# Altium PCB HACK_IO-C.PcbDoc
Units mm, origin at the board's own origin, x right, y up, seen from the top; angles counter-clockwise.
Board outline 41 x 13 mm, 6 copper layers (Top Layer, Mid-Layer 1, Mid-Layer 2, Mid-Layer 3, Mid-Layer 4, Bottom Layer); 21 components, 44 nets, 150 pads, 76 vias.
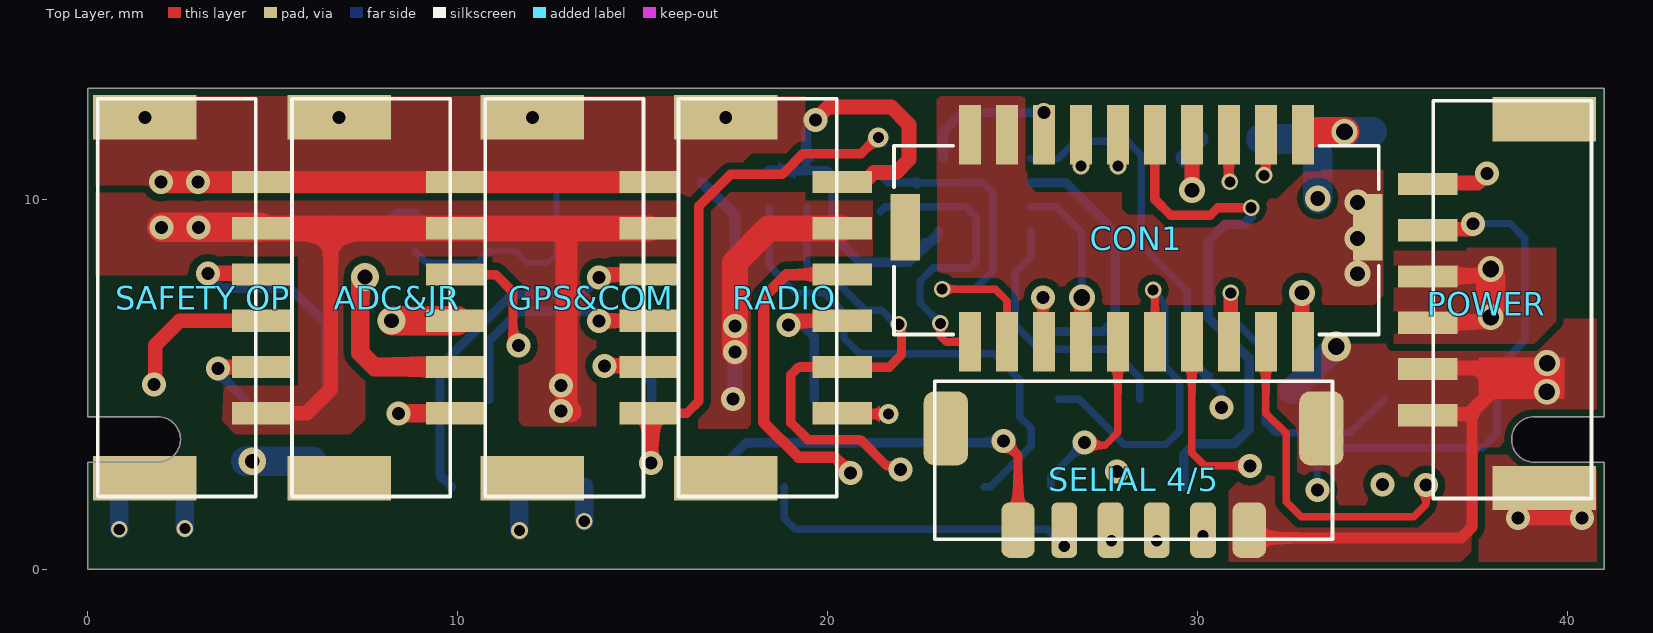
[diagram p0: Top Layer view]
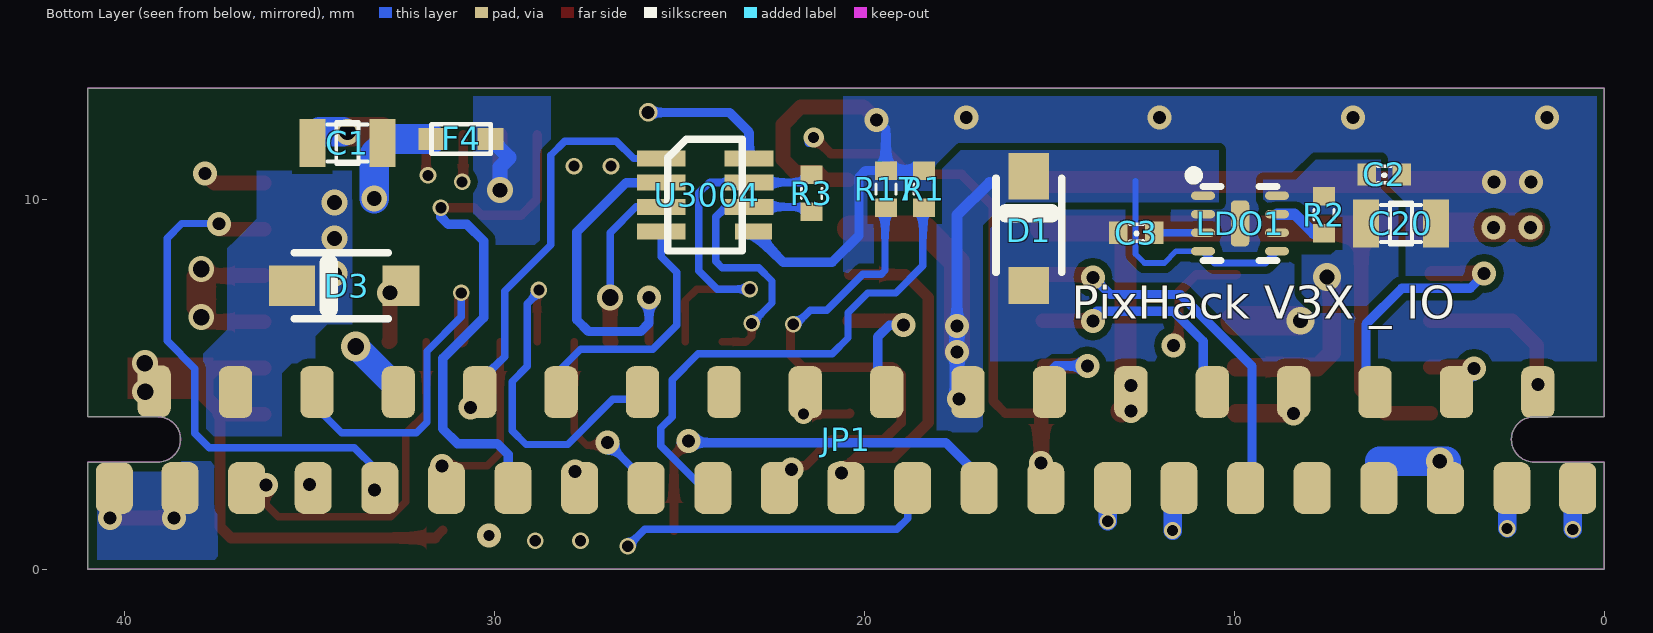
[diagram p1: Bottom Layer view, seen from below]
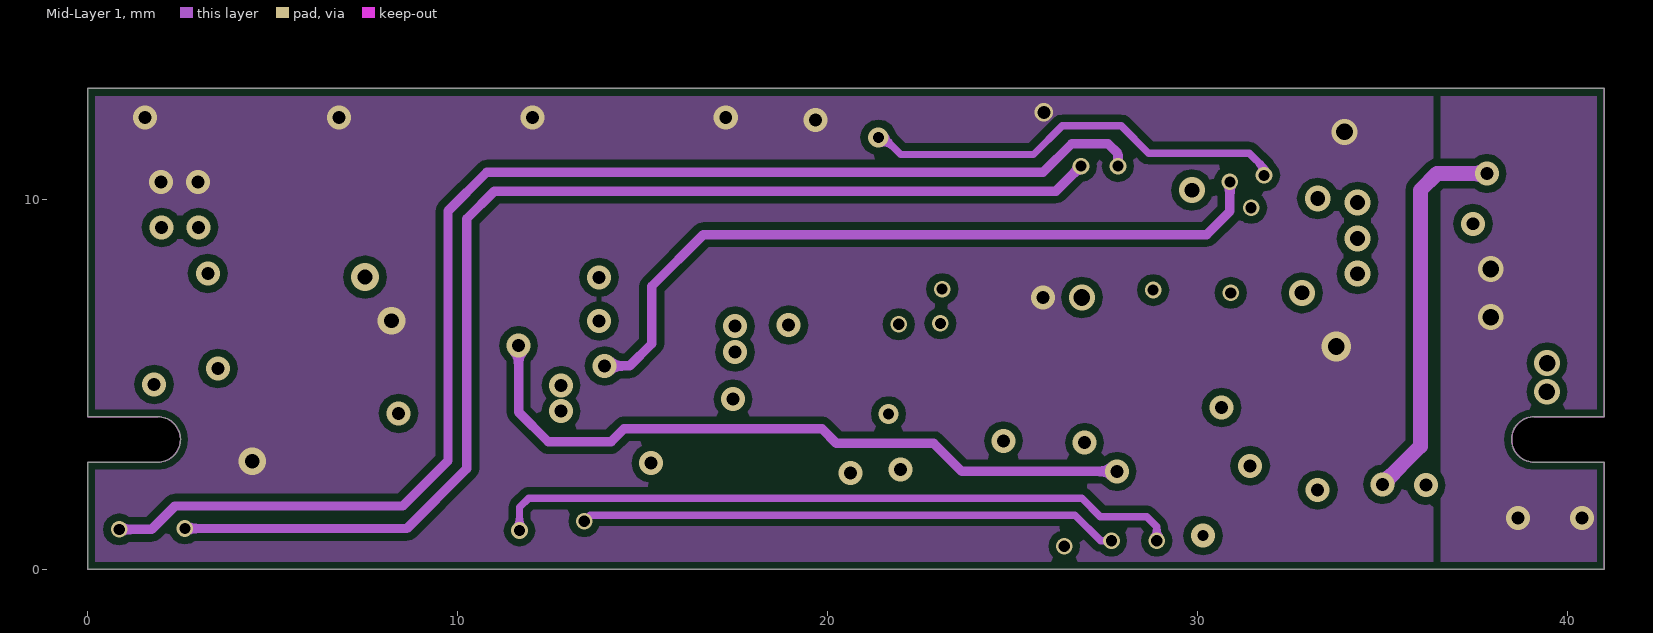
[diagram p2: Mid-Layer 1]
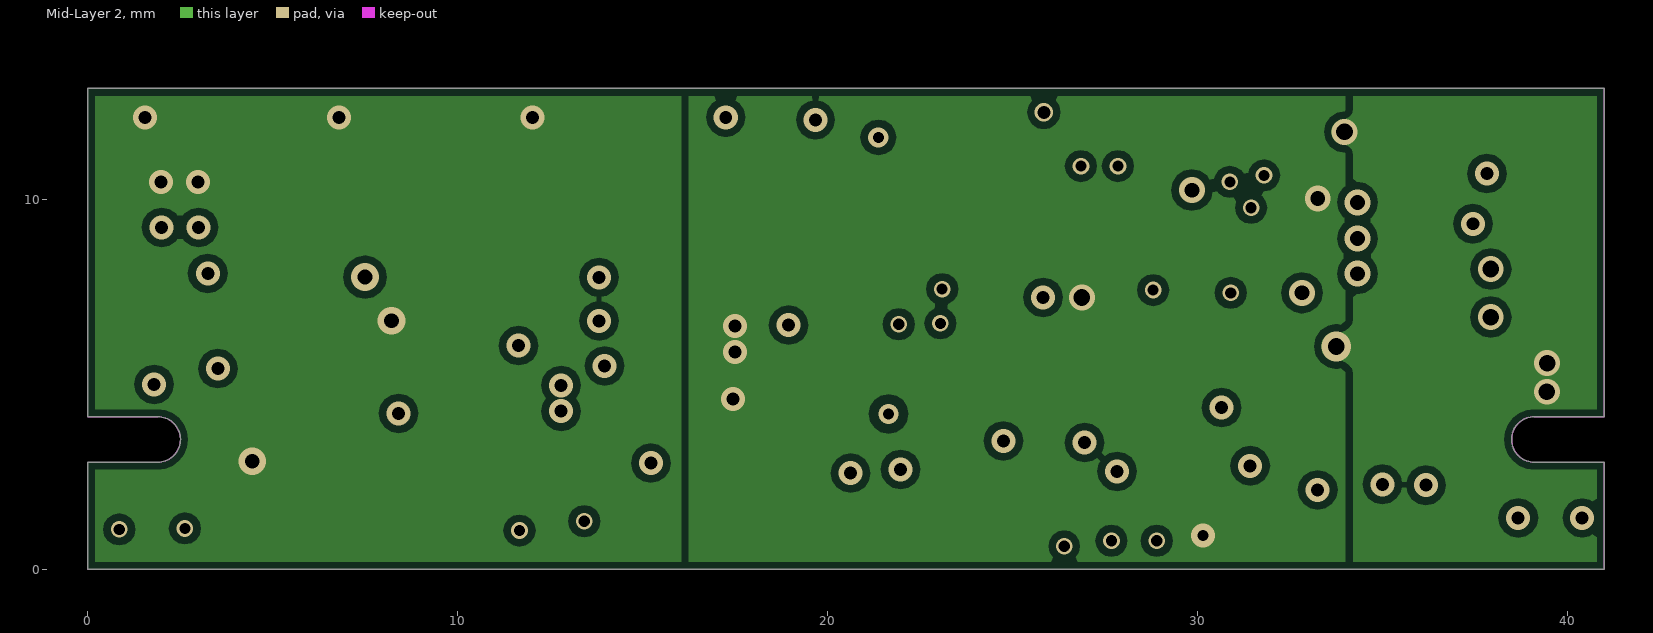
[diagram p3: Mid-Layer 2]
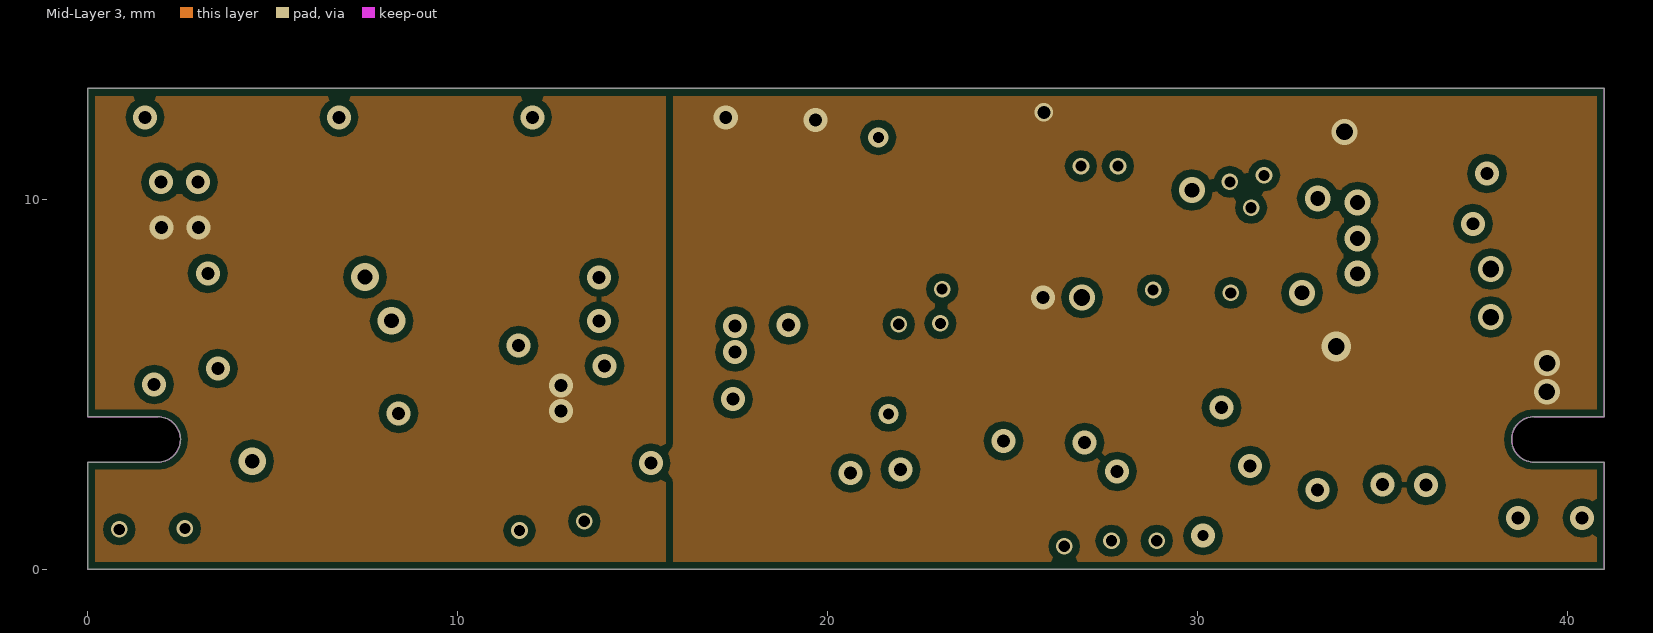
[diagram p4: Mid-Layer 3]
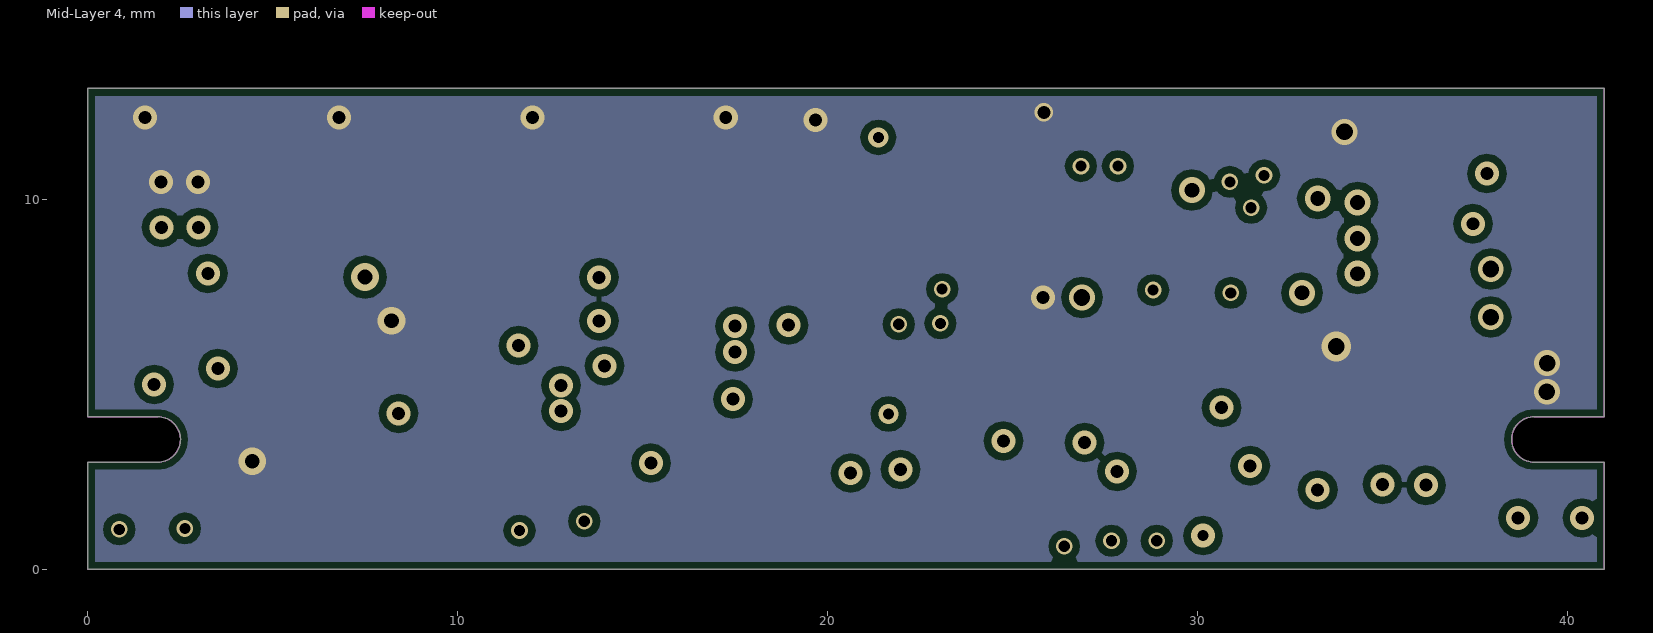
[diagram p5: Mid-Layer 4]
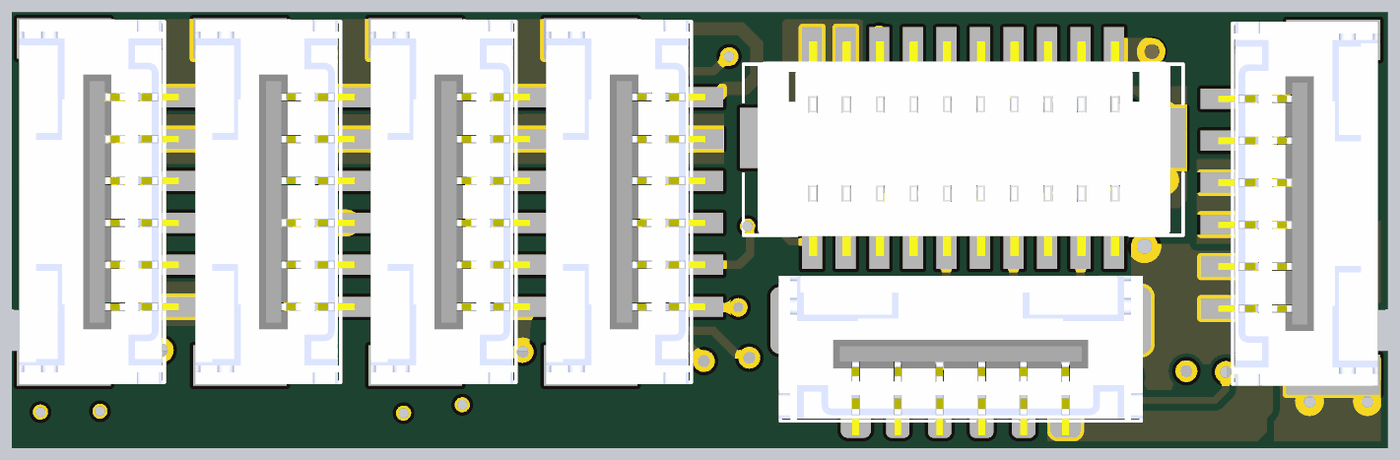
[diagram p6: 3D render of the assembled board from above, using the file's embedded part models]
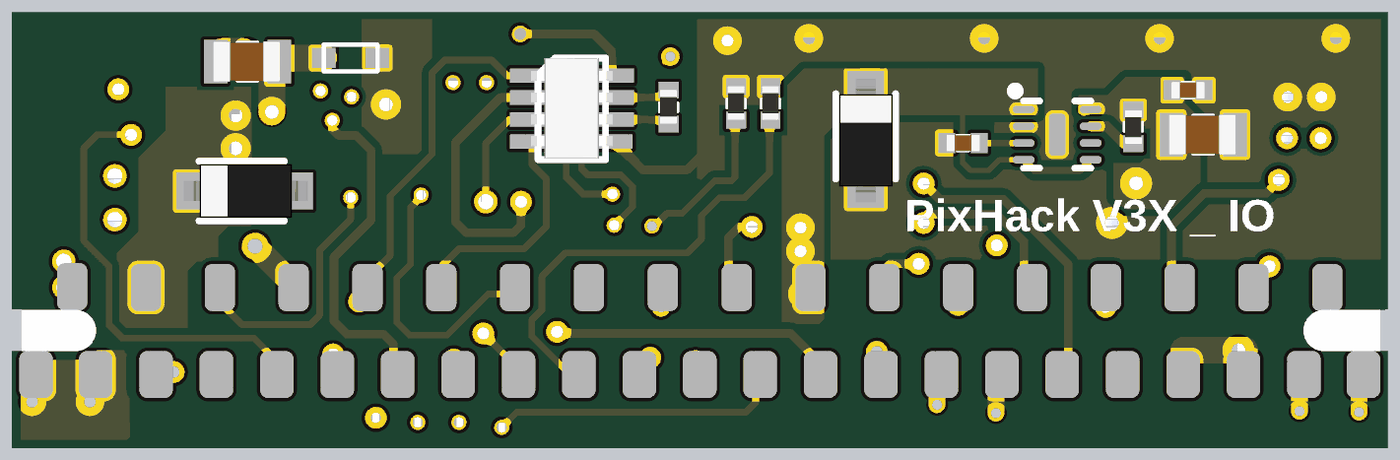
[diagram p7: 3D render of the assembled board from below, using the file's embedded part models]

## Layer stack, top to bottom
Top Solder: solder mask 0.0102, Solder Resist, Dk 3.5
Top Layer: signal copper 0.0356
Dielectric1: core 0.32, FR-4, Dk 4.8
Mid-Layer 1: signal copper 0.0356
Dielectric2: prepreg 0.32, FR-4, Dk 4.8
Mid-Layer 2: signal copper 0.0356
Dielectric3: core 0.32, FR-4, Dk 4.8
Mid-Layer 3: signal copper 0.0356
Dielectric5: dielectric 0.32, FR-4, Dk 4.8
Mid-Layer 4: signal copper 0.0356
Dielectric4: dielectric 0.32, FR-4, Dk 4.8
Bottom Layer: signal copper 0.0356
Bottom Solder: solder mask 0.0102, Solder Resist, Dk 3.5

## Board outline
0,0 0,2.9 1.9,2.9 ccw(c1.9,3.513) 1.9,4.125 0,4.125 0,13 41,13 41,4.125 39.1,4.125 ccw(c39.1,3.513) 39.1,2.9 41,2.9 41,0

## Design rules (kind name [scope] priority, off if disabled: settings)
Clearance [All] p1: gap=0.2
PlaneConnect [All] p1: planeconnectstyle=Direct reliefexpansion=0.508 reliefentries=4 reliefconductorwidth=0.254 reliefairgap=0.254
PolygonConnect [All] p1: connectstyle=Direct reliefconductorwidth=0.254 reliefentries=4 polygonreliefangle="90 Angle" airgapwidth=0.254
RoomDefinition HACK_IO-C [InComponentClass('HACK_IO-C')] p1: confinementstyle=ConfineIn formatcopy=TRUE lockcomponents=FALSE outline 42.135,1.422 60.961,1.422 60.961,7.548 42.135,7.548
RoutingVias [All] p1: holewidth=0.35 width=0.6 viastyle="Through Hole" minholewidth=0.3 minwidth=0.55 maxholewidth=0.7 maxwidth=1.27
SilkToSolderMaskClearance SilkscreenOverComponentPads [IsPad] p1: minsilkscreentomaskgap=0.254 clearancetoexposedcopper=TRUE
SolderMaskExpansion [All] p1: expansion=0.102
Width [All] p1: maxlimit=1 minlimit=0.15 preferedwidth=0.254 midlayer1_minwidth=0.2 midlayer2_minwidth=0.2 midlayer3_minwidth=0.254 midlayer3_maxwidth=0.254 midlayer4_minwidth=0.254 midlayer4_maxwidth=0.254 minimp=50.000000 maximp=50.000000 favimp=50.000000
28 further rules are at their usual default settings.

## Components (designator, comment, footprint, x,y, rotation, side; value= is the part's Value field where it differs from the comment)
ADC&JR "BM06B-GHS-TBT" GH1.25-6#1 9.85,7.318 r270 top
C1 "22UF" 0805CAP 33.975,11.55 r180 bottom
C2 "100NF" 0402CAP#1 5.95,10.65 r0 bottom
C3 "100NF" 0402CAP#2 12.65,9.075 r0 bottom
C20 "22UF" 0805CAP 5.5,9.375 r180 bottom
CON1 "501190-2027" SHD1X20 28.125,8.85 r0 top locked
D1 "D240L" SOD-123 15.45,9.1 r90 bottom
D3 "D240L" SOD-123 33.95,7.775 r0 bottom
F4 "0R" KYOCERA-KNH16-DA 30.925,11.75 r180 bottom
GPS&COM "BM06B-GHS-TBT" GH1.25-6#1 15.075,7.318 r270 top
JP1 "hack_op2" hack_op2 20.869,3.066 r0 top
LDO1 "MIC5330-SSYML" MIC5530 9.85,9.35 r180 bottom
POWER "BM06B-GHS-TBT" GH1.25-6#2 36.325,7.318 r90 top
R1 "100K" R0402 18.373,10.287 r270 bottom
R2 "0R" R0402 7.6,9.575 r90 bottom
R3 "100K" R0402 21.41,10.175 r270 bottom
R17 "100K" R0402 19.398,10.287 r270 bottom
RADIO "BM06B-GHS-TBT" GH1.25-6#1 20.3,7.318 r270 top
"SAFETY OP" "BM06B-GHS-TBT" GH1.25-6#1 4.6,7.318 r270 top
"SELIAL 4/5" "BM06B-GHS-TBT" GH1.25-6#3 28.25,0.762 r180 top
U3004 "MAX3051EKA+T" SOT23-8 24.195,10.128 r270 bottom

## Footprints (in the part's own frame and the unit in brackets; to place one, negate y for a bottom-side part, rotate by r counter-clockwise, add the part's x,y. Pads: shape width x height; smd on the part's side, far side on the other; paste and mask are expansions set on the pad)
0402CAP#1 [mm]
  rect 0.5x0.6 smd: 1(-0.475,-0.025) 2(0.475,-0.025)
  silkscreen extent -0.18,-0.25 0.18,0.2, body extent -0.5,-0.28 0.5,0.22, height 0.5
0402CAP#2 [mm]
  rect 0.5x0.6 smd: 1(-0.475,-0.025) 2(0.49,-0.025)
  silkscreen extent -0.18,-0.25 0.18,0.2, body extent -0.5,-0.28 0.5,0.22, height 0.5
0805CAP [mm]
  rect 0.7x1.3 smd: 1(-0.95,-0.025) 2(0.95,-0.025)
  silkscreen extent -0.55,-0.6 0.55,0.55, body extent -1.02,-0.62 0.98,0.58, height 1.2
GH1.25-6#1 [mm]
  rect 1.2x2.8 smd: 0(4.85,-3.05) 1(-4.9,-3.05)
  rect 0.6x1.6 smd: 1(-3.15,0.1) 2(-1.9,0.1) 3(-0.65,0.1) 4(0.6,0.1) 5(1.85,0.1) 6(3.1,0.1)
  silkscreen extent -5.4,-4.32 5.35,-0.05, body extent -5.45,-4.38 5.4,0.37, height 4.5
GH1.25-6#2 [mm]
  rect 1.2x2.8 smd: 0(4.85,-3.05) 3(-5.118,-3.05)
  rect 0.6x1.6 smd: 1(-3.15,0.1) 2(-1.9,0.1) 3(-0.65,0.1) 4(0.6,0.1) 5(1.85,0.1) 6(3.1,0.1)
  silkscreen extent -5.4,-4.32 5.35,-0.05, body extent -5.45,-4.38 5.4,0.37, height 4.5
GH1.25-6#3 [mm]
  rrect50% 1.2x2 smd: 0(5.05,-3.05) 1(-5.1,-3.05)
  rrect50% 0.9x1.5 smd: 1(-3.15,-0.3) 6(3.1,-0.3)
  rrect50% 0.7x1.5 smd: 2(-1.9,-0.3) 3(-0.65,-0.3) 4(0.6,-0.3) 5(1.85,-0.3)
  silkscreen extent -5.4,-4.32 5.35,-0.05, body extent -5.45,-4.38 5.4,0.37, height 4.5
hack_op2 [mm]
  rrect50% 0.9x1.4 smd far side: 1(-19.069,1.726) 2(-16.869,1.726) 3(-14.669,1.726) 4(-12.469,1.726) 5(-10.269,1.726) 6(-8.069,1.726) 7(-5.869,1.726) 8(-3.669,1.726) 9(-1.469,1.726) 10(0.731,1.726) 11(2.931,1.726) 12(5.131,1.726) 13(7.331,1.726) 14(9.531,1.726) 15(11.731,1.726) 16(13.931,1.726) 17(16.131,1.726) 18(18.331,1.751)
  rrect50% 1x1.4 smd far side: 19(-20.144,-0.866) 20(-18.369,-0.866) 21(-16.569,-0.866) 22(-14.769,-0.866) 23(-12.969,-0.866) 24(-11.169,-0.866) 25(-9.369,-0.866) 26(-7.569,-0.866) 27(-5.769,-0.866) 28(-3.969,-0.866) 29(-2.169,-0.866) 30(-0.369,-0.866) 31(1.431,-0.866) 32(3.231,-0.866) 33(5.031,-0.866) 34(6.831,-0.866) 35(8.631,-0.866) 36(10.431,-0.866) 37(12.231,-0.866) 38(14.031,-0.866) 39(15.831,-0.866) 40(17.631,-0.866) 41(19.406,-0.866)
  Keep-Out Layer lines w0.002: -20.869,1.059 -18.969,1.059 cw(c-18.969,0.446) -18.969,-0.166 -20.869,-0.166 -20.869,-3.066 20.131,-3.066 20.131,-0.166 18.231,-0.166 cw(c18.231,0.446) 18.231,1.059 20.131,1.059
KYOCERA-KNH16-DA [mm]
  rect 0.7x0.6 smd: 1(0.822,-0.117) 2(-0.778,-0.117)
  silkscreen extent -0.78,-0.52 0.82,0.28
MIC5530 [mm] "QFN, 8-Leads, Body 2.0x2.0mm (max), Pitch 0.00mm, Pitch1 0.50mm, IPC Medium Density"
  oval 0.65x0.225 smd: 1(-1,0.75) 2(-1,0.25) 3(-1,-0.25) 4(-1,-0.75) 5(1,-0.75) 6(1,-0.25) 7(1,0.25) 8(1,0.75)
  rrect50% 0.5x1.25 smd: 2(0,0)
  silkscreen extent -1.38,-1 1,1.42, body extent -1,-1 1,1, height 0.85
R0402 [mm]
  rect 0.5x0.6 smd: 1(-0.494,-0.021) 2(0.506,-0.021)
  silkscreen extent -0.13,-0.3 0.15,0.25, body extent -0.5,-0.27 0.5,0.23, height 0.3
SHD1X20 [mm]
  rect 0.8x1.8 smd: 0(-6.025,0.4) 20(6.475,0.4)
  rect 0.6x1.6 smd: 1(-4.275,-2.7) 2(-3.275,-2.7) 3(-2.275,-2.7) 4(-1.275,-2.7) 5(-0.275,-2.7) 6(0.725,-2.7) 7(1.725,-2.7) 8(2.725,-2.7) 9(3.725,-2.7) 10(4.725,-2.7) 11(4.725,2.9) 12(3.725,2.9) 13(2.725,2.9) 14(1.725,2.9) 15(0.725,2.9) 16(-0.275,2.9) 17(-1.275,2.9) 18(-2.275,2.9) 19(-3.275,2.9) 20(-4.275,2.9)
  silkscreen extent -6.32,-2.5 6.78,2.6, body extent -5.9,-3.12 6.4,3.28, height 5.36
SOD-123 [mm]
  rect 1x1.1 smd: 1(-1.427,0.107)
  rect 1.25x1.1 smd: 2(1.523,0.107)
  silkscreen extent -1.07,-0.78 1.47,1, body extent -1.77,-0.7 1.93,0.9, height 1.27
SOT23-8 [mil]
  rect 17x52 smd: 1(-38.46,-51.13) 2(-12.87,-51.13) 3(12.93,-51.13) 4(38.93,-51.13) 6(12.93,42.13) 7(-12.87,42.13) 8(-38.46,42.13)
  rect 17x39.37 smd: 5(38.93,47.04)
  silkscreen extent -59,-44 60,35, body extent -59,-60 59,50, height 44

## Part data
ADC&JR GPS&COM POWER RADIO "SAFETY OP" "SELIAL 4/5": library part GH1.25-6
C1 C2 C3 C20: library part Cap
CON1: library part SHD1X20
D1 D3: library part "D Schottky", "Schottky Diode"
F4: library part KYOCERA-KNH16-DA
LDO1: library part MIC5530
R1 R2 R3 R17: library part Res2, "Resistor"
U3004: library part MAX3051MAX3051EKA, "IC TXRX CAN 1MBPS SOT23-8"

## Via types
v1: diameter 0.65, hole 0.35, Top Layer to Bottom Layer, 39 vias
v2: diameter 0.45, hole 0.3, Top Layer to Bottom Layer, 17 vias
v3: diameter 0.7, hole 0.45, Top Layer to Bottom Layer, 6 vias
v4: diameter 0.7, hole 0.4, Top Layer to Bottom Layer, 6 vias
v5: diameter 0.75, hole 0.4, Top Layer to Bottom Layer, 3 vias
v6: diameter 0.55, hole 0.3, Top Layer to Bottom Layer, 2 vias
v7: diameter 0.5, hole 0.35, Top Layer to Bottom Layer, 1 vias
v8: diameter 0.8, hole 0.45, Top Layer to Bottom Layer, 1 vias
v9: diameter 0.65, hole 0.3, Top Layer to Bottom Layer, 1 vias

## Nets (pads, with @x,y where several pads share a name; then routed paths per layer and width w, separated by ;. In a path a pad name is that pad's centre, name@x,y a point inside that pad or via, vN(x,y) a via of type N, cw(c..) or ccw(c..) an arc to the next point about the centre after c; other vN are vias at no path point)
ADC1_IN: CON1.15 JP1.35 | length 14.7
  Top Layer w0.254: CON1.15 28.85,10 29.277,9.573 30.348,9.573 30.55,9.775 v2(31.45,9.775)
  Bottom Layer w0.254: JP1.35@29.631,2.234 29.631,3.106 29.925,3.4 31.002,3.4 31.399,3.797 31.398,3.798 31.398,5.702 30.294,6.806 30.294,8.876 30.743,9.325 31.25,9.325 31.45,9.525 v2(31.45,9.775)
ADC2_IN: CON1.7 JP1.36 | length 4.8
  Top Layer w0.2: CON1.7 29.85,3.15 30.2,2.8 31.2,2.8 v1@31.425,3.025
  other v1: 31.425,2.8
ADC6.6: ADC&JR.3 JP1.34 | length 22.2
  Top Layer w0.254: ADC&JR.3 11.032,7.968 11.5,7.5 11.5,6.2 v1(11.65,6.05)
  Mid-Layer 1 w0.254: v1(11.65,6.05) 11.65,4.25 12.45,3.45 14.15,3.45 14.5,3.8 19.85,3.8 20.244,3.406 22.869,3.406 23.625,2.65 v1(27.825,2.65)
ALARM: "SAFETY OP.3" JP1.3 | length 7.3
  Top Layer w0.254: 4.668,8 4.7,7.968
  Top Layer w0.4: v1(3.25,8) 4.668,8
  Bottom Layer w0.254: v1@3.237,7.987 3.625,7.6 5.475,7.6 6.445,6.63 JP1.3@6.445,4.6
BATT_CURRENT: JP1.37 POWER.5 | length 14.2
  Top Layer w0.4: POWER.5@36.225,9.193 v1@37.442,9.193 ; v1@37.442,9.343 v1(37.444,9.341)
  Bottom Layer w0.2: JP1.37@33.231,2.234 33.231,2.731 33.788,3.288 37.713,3.288 38.1,3.675 38.1,5.425 38.85,6.175 38.85,8.95 38.45,9.35 v1@37.425,9.35
  other v1: 33.25,2.15
BATT_VOLTAGE: JP1.38 POWER.6 | length 12.1
  Top Layer w0.4: POWER.6@36.225,10.443 37.568,10.443 v1(37.825,10.7)
  Mid-Layer 1 w0.4: v1(35,2.3) 36.025,3.325 36.025,10.25 36.475,10.7 v1(37.825,10.7)
CAN1_RX: JP1.13 U3004.4 | length 7.3
  Bottom Layer w0.2: U3004.4 25.494,8.451 25.075,8.033 25.075,6.6 25.725,5.95 27.675,5.95 28.445,5.18 JP1.13@28.445,4.6
CAN1_TX: JP1.14 U3004.1 | length 10.8
  Bottom Layer w0.2: U3004.1 26.236,11.104 26.706,11.575 28.1,11.575 28.475,11.2 28.475,8.775 29.725,7.525 29.725,5.75 30.645,4.83 JP1.14@30.645,4.6
  other v1: 30.65,4.375
CAN_H_1: CON1.2 R3.1 U3004.7 | length 9.9
  Top Layer w0.2: v2(23.1,7.575) 24.536,7.575 24.85,7.261 CON1.2
  Bottom Layer w0.2: R3.1 21.645,10.454 U3004.7 24.196,10.454 24.475,10.175 24.475,8.075 23.975,7.575 v2(23.1,7.575)
CAN_L_1: CON1.1 R3.2 U3004.6 | length 8.3
  Top Layer w0.2: v2(23.05,6.65) 23.05,6.3 23.2,6.15 CON1.1
  Bottom Layer w0.2: R3.2 21.561,9.799 U3004.6 23.751,9.799 24.021,9.529 24.021,8.325 23.85,8.154 22.86,8.154 22.5,7.794 22.5,7.2 v2(23.05,6.65)
DM: CON1.9 JP1.39 | length 9.2
  Top Layer w0.2: CON1.9 31.85,4.225 32.396,3.679 32.396,1.829 32.8,1.425 35.85,1.425 36.175,1.75 v1(36.175,2.275)
DP: CON1.8 JP1.16 | length 8.9
  Top Layer w0.2: CON1.8 CON1.8@30.9,6.2
  Top Layer w0.4: CON1.8@30.9,6.2 v2(30.9,7.475)
  Bottom Layer w0.2: v2(30.9,7.475) 30.9,6.825 31.825,5.9 31.825,3.975 32.112,3.688 34.133,3.688 JP1.16@35.045,4.6
GND: "SAFETY OP.1" "SELIAL 4/5.1" ADC&JR.1 ADC&JR.4 C1.1 C2.1 C3.2 C20.2 CON1.3 CON1.11 CON1.18 D1.1 GPS&COM.1 JP1.15 JP1.18 JP1.21 JP1.22 LDO1.2 POWER.1 POWER.2 R1.1 R17.1 RADIO.1 U3004.2 U3004.5 U3004.8 | length 60.9
  Top Layer w0.254: RADIO.1@20.4,10.468 RADIO.1@20.463,10.531 ; CON1.3@25.825,6.175 v1(25.825,7.35) ; 31.4,1.062 31.612,0.85
  Top Layer w0.3: 31.612,0.85 37.125,0.85 37.425,1.15 37.425,4.343
  Top Layer w0.4: v1(19.675,12.15) 20.025,12.5 21.725,12.5 22.2,12.025 22.2,11.075 21.85,10.725 21.25,10.725 21.056,10.531 RADIO.1@20.463,10.531 ; POWER.1@36.225,4.193 37.425,4.193 ; POWER.2@36.225,5.443 37.557,5.443 37.925,5.075 ; 37.343,4.193 37.925,4.775 ; 37.925,4.925 37.925,5.225
  Top Layer w0.6: v1(1.982,10.468) v1(2.982,10.468) 4.7,10.468 9.95,10.468 GPS&COM.1@15.175,10.468
  Top Layer w0.8: v5@8.243,6.718 ADC&JR.4@9.975,6.718 ; CON1.11@32.975,11.75 33.05,11.825 v3(33.975,11.825)
  Bottom Layer w0.254: R1.1 R17.1 ; v1(19.675,12.15) 19.419,11.894 R17.1 ; U3004.5 23,9.1 22.2,8.3 20.875,8.3 20.15,9.025 20.15,10.6 19.969,10.781 R17.1 ; U3004.8 23.125,11.825 23.65,12.35 v7(25.85,12.35) ; U3004.2 26.438,10.454 27.775,9.118 27.775,6.75 27.456,6.431 26.05,6.431 25.825,6.656 v1(25.825,7.35)
  Bottom Layer w0.7: JP1.15@32.545,4.825 v8@33.747,6.028
  Bottom Layer w0.8: v5@4.275,2.925 6.075,2.925 ; v3@34.1,11.825 C1.1@34.725,11.825
  other v1: 1.55,12.218 6.8,12.218 12.025,12.218 17.25,12.218
  other v3: 39.445,4.8 39.45,5.575
  other v5: 4.45,2.925 8.218,6.718
  other v8: 33.75,6.025
GPS1_RX: GPS&COM.3 JP1.24 | length 10
  Top Layer w0.4: v1@13.827,7.968 GPS&COM.3
  Bottom Layer w0.254: JP1.24@9.831,2.234 9.525,2.54 9.525,5.489 11.465,7.429 13.356,7.429 v1@13.827,7.9
  other v1: 13.827,7.893
GPS1_TX: GPS&COM.4 JP1.5 | length 6.5
  Top Layer w0.4: v1(13.827,6.718) GPS&COM.4
  Bottom Layer w0.254: JP1.5@10.845,4.6 10.845,6.167 11.653,6.975 13.725,6.975 v1@13.975,6.725
I2C2_SCL: CON1.16 JP1.19 | length 36.9
  Mid-Layer 1 w0.254: v2(0.856,1.081) 1.731,1.081 2.362,1.712 8.519,1.712 9.742,2.935 9.742,9.685 10.79,10.733 25.826,10.733 26.599,11.506 27.581,11.506 27.85,11.237 v2(27.85,10.9)
  Bottom Layer w0.254: v2@0.8,1.025 v2(0.856,1.081)
  Bottom Layer w0.5: v2(0.856,1.081) JP1.19@0.856,2.234
I2C2_SDA: CON1.17 JP1.20 | length 33.4
  Mid-Layer 1 w0.254: v2(2.631,1.106) 8.631,1.106 10.25,2.725 10.25,9.475 11,10.225 26.175,10.225 v2(26.85,10.9)
  Bottom Layer w0.5: v2(2.631,1.106) JP1.20@2.631,2.234
I2C_SCL: CON1.13 GPS&COM.5 JP1.7 | length 24.7
  Top Layer w0.254: GPS&COM.5@15.143,5.5 GPS&COM.5 ; v2@30.85,10.475 CON1.13
  Top Layer w0.4: v1@14.025,5.5 GPS&COM.5@15.143,5.5
  Mid-Layer 1 w0.254: v1(13.975,5.5) 14.65,5.5 15.25,6.1 15.25,7.653 16.647,9.05 30.25,9.05 30.875,9.675 v2(30.875,10.475)
  Bottom Layer w0.254: v1@14.025,5.5 14.825,5.5 15.245,5.08 JP1.7@15.245,4.6
I2C_SDA: CON1.12 GPS&COM.6 JP1.27 | length 26.6
  Top Layer w0.254: GPS&COM.6 16.193,4.218 16.525,4.55 16.525,9.825 17.375,10.675 18.775,10.675 19.337,11.237 20.912,11.237 v6@21.363,11.688 ; v2(31.8,10.65) 31.85,10.7 CON1.12
  Top Layer w0.4: v1(15.225,2.875) GPS&COM.6@15.225,4.168
  Mid-Layer 1 w0.2: v6(21.375,11.675) 21.514,11.675 21.975,11.214 25.568,11.214 26.341,11.987 27.938,11.987 28.675,11.25 31.4,11.25 31.8,10.85 v2(31.8,10.65)
  Bottom Layer w0.254: v6(21.375,11.675) v6@21.5,11.55
JR_3V3: ADC&JR.5 C2.2 C20.1 LDO1.8 R2.2 | length 5.1
  Top Layer w0.254: v5@7.375,7.9 v5@7.575,8.1
  Top Layer w0.5: v5@7.375,7.9 7.375,5.85 7.757,5.468 ADC&JR.5
  other v5: 7.5,7.9
NetC3_1: C3.1 LDO1.3 | length 1.3
  Bottom Layer w0.2: LDO1.3 C3.1
NetLDO1_7: LDO1.7 R2.1 | length 1.5
  Bottom Layer w0.3: R2.1 7.856,9.081 8.375,9.6 LDO1.7
SAFE_LED: "SAFETY OP.5" JP1.2 | length 2.3
  Top Layer w0.254: v1(3.525,5.425) v1@3.568,5.468
  Top Layer w0.4: v1@3.568,5.468 4.7,5.468
  Bottom Layer w0.254: v1(3.525,5.425) 3.525,5.32 JP1.2@4.245,4.6
SAFETY: "SAFETY OP.4" JP1.1 | length 4.2
  Top Layer w0.254: v1(1.8,5) v1@1.829,5
  Top Layer w0.4: v1@1.829,5 1.829,6.054 2.493,6.718 4.7,6.718
TELEM1_CTS: JP1.31 R17.2 RADIO.5 | length 13.6
  Top Layer w0.254: v2@21.85,6.625 22,6.475 22,5.8 21.668,5.468 RADIO.5 19.218,5.468 19.011,5.261 19.011,3.957 19.022,3.957 19.471,3.508 20.89,3.508 21.598,2.8 v1@21.975,2.8
  Bottom Layer w0.2: R17.2@19.446,9.781 19.446,8.079 19.55,7.975 20.05,7.975 21.021,7.004 21.471,7.004 v2@21.85,6.625
  other v1: 21.975,2.7
  other v2: 21.925,6.625
TELEM1_RTS: JP1.10 RADIO.6 | length 1.3
  Top Layer w0.254: RADIO.6 20.418,4.2 v6(21.65,4.2)
TELEM1_RX: JP1.30 RADIO.3 | length 8.7
  Top Layer w0.3: RADIO.3 18.893,7.968 18.276,7.351 18.276,7.051 18.276,3.974 19.219,3.031 20.194,3.031 v1(20.625,2.6)
TELEM1_TX: JP1.9 RADIO.4 | length 4
  Top Layer w0.254: v1(18.951,6.6) 18.951,6.626 v1@19.043,6.718
  Top Layer w0.4: v1@19.043,6.718 RADIO.4
  Bottom Layer w0.254: v1(18.951,6.6) 19.325,6.6 19.645,6.28 JP1.9@19.645,4.6
TELEM2_CTS: JP1.32 R1.2 | length 13.7
  Bottom Layer w0.2: R1.2@18.421,9.781 18.421,8.204 19.156,7.469 19.914,7.469 20.446,6.937 20.446,6.254 20.875,5.825 24.5,5.825 25.2,5.125 25.2,4.126 25.505,3.821 25.505,3.342 24.396,2.234 JP1.32@24.231,2.234
TELEM2_RTS: JP1.11
TELEM2_RX: CON1.6 JP1.12 | length 9.2
  Top Layer w0.2: CON1.6 v2@28.85,7.35
  Bottom Layer w0.2: JP1.12@26.245,4.6 26.8,4.6 28.025,3.375 29.15,3.375 29.525,3.75 29.525,5.078 29.117,5.486 29.117,7.183 28.802,7.498 v2(28.802,7.55)
TELEM2_TX: CON1.5 JP1.33 | length 5.2
  Top Layer w0.2: v1@26.775,3.35 27.5,3.35 27.85,3.7 CON1.5
  Bottom Layer w0.2: JP1.33@26.031,2.234 26.031,2.506 v1(26.95,3.425)
TELEM4_RX: "SELIAL 4/5.3" JP1.25 | length 19.8
  Mid-Layer 1 w0.2: v2(11.675,1.05) 11.675,1.675 11.921,1.921 26.879,1.921 27.375,1.425 28.625,1.425 28.9,1.15 v2(28.9,0.775)
  Mid-Layer 2 w0.2: v2(28.9,0.775) v2@28.9,0.8
  Bottom Layer w0.5: v2(11.675,1.05) JP1.25@11.675,2.19
TELEM4_TX: "SELIAL 4/5.4" JP1.26 | length 15.5
  Mid-Layer 1 w0.2: v2(13.425,1.3) 13.592,1.467 26.691,1.467 27.383,0.775 v2(27.675,0.775)
  Bottom Layer w0.5: v2@13.431,1.3 JP1.26@13.431,2.234
TELEM5_RX: "SELIAL 4/5.5" JP1.29 | length 8.7
  Bottom Layer w0.2: JP1.29@18.831,2.234 18.831,1.375 19.125,1.081 25.944,1.081 v2(26.4,0.625)
TELEM5_TX: "SELIAL 4/5.6" JP1.28 | length 11.2
  Top Layer w0.254: v1(24.753,3.474) 25.15,3.076 25.15,1.062
  Bottom Layer w0.254: JP1.28@17.031,2.234 17.031,2.656 17.8,3.425 v1@24.95,3.425
USART1_RX: ADC&JR.6 JP1.4 | length 1.5
  Top Layer w0.5: v1(8.407,4.218) ADC&JR.6
VBUS: CON1.19 CON1.20 D3.2 JP1.17
  other v4: 34.327,7.993 34.327,8.943 34.327,9.918
VBUS_IN: CON1.10 D3.1 | length 1.3
  Top Layer w0.4: v4(32.825,7.475) 32.825,6.175 CON1.10
VCC_OUT1: "SELIAL 4/5.2" C1.2 CON1.4 D1.2 F4.2 JP1.8 LDO1.1 LDO1.4 LDO1.5 RADIO.2 U3004.3 | length 25.5
  Top Layer w0.4: CON1.4 26.875,6.175 v3(26.875,7.35)
  Top Layer w0.7: v1(17.5,5.875) v1(17.5,6.575) 17.5,8.3 18.418,9.218 RADIO.2
  Bottom Layer w0.15: LDO1.4 11.575,8.6 11.894,8.281 12.431,8.281 12.675,8.525 12.675,10.5
  Bottom Layer w0.2: LDO1.5 9.169,8.281 10.531,8.281 LDO1.4 ; U3004.3 26.176,9.799 26.875,9.1 v3(26.875,7.35)
  Bottom Layer w0.3: 16.625,10.45 17.5,9.575 v1(17.5,6.575)
  Bottom Layer w0.4: JP1.8@17.5,4.655 v1(17.5,5.875) v1@17.5,6.375
  Bottom Layer w0.8: F4.2@31.707,11.633 32.867,11.633 33.025,11.475 33.025,11.431 33.25,11.206 v4(33.25,10.025)
  other v1: 17.445,4.6
  other v9: 30.15,0.912
VCC_OUT2: "SAFETY OP.2" "SAFETY OP.6" ADC&JR.2 GPS&COM.2 JP1.6 | length 24.5
  Top Layer w0.4: 4.7,4.218 5.918,4.218 6.575,4.875 6.575,9.218
  Top Layer w0.6: 12.948,9.045 12.948,4.377 v1@13.05,4.275
  Top Layer w0.7: 4.7,9.218 6.575,9.218 ADC&JR.2 GPS&COM.2
  Top Layer w0.8: v1(2.002,9.243) v1(3.002,9.243) 4.675,9.243
  other v1: 12.8,4.275 12.8,4.975
VCC_OUT3: CON1.14 F4.1 | length 3.2
  Top Layer w0.4: v4(29.85,10.25) CON1.14
  Bottom Layer w0.4: v4(29.85,10.25) 29.85,10.879 29.6,11.129 F4.1
VDD_5V_BRICK_IN: JP1.40 JP1.41 POWER.3 POWER.4 | length 7.8
  Top Layer w0.4: POWER.3@36.225,6.693 v3@37.902,6.693 ; POWER.4@36.225,7.943 v3@37.902,7.943 ; v3@37.725,6.918 v3@37.725,8.093 ; v3@37.902,6.843 38.125,7.066 38.125,7.92 v3(37.927,8.118) ; v1(38.669,1.391) v1@40.444,1.391
  other v1: 40.394,1.391
  other v3: 37.927,6.818
VDD_5V_IN: JP1.23
pads on no net: "SAFETY OP.0" "SELIAL 4/5.0" ADC&JR.0 CON1.0 GPS&COM.0 LDO1.6 POWER.0 RADIO.0

## Polygon pours and split planes (outlines as drawn)
VDD_5V_BRICK_IN on Mid-Layer 1 "Top Layer-No Net" (solid, remove dead copper, pour order 2): 41.15,13.275 41.075,13.2 36.575,13.2 36.575,-0.175 36.6,-0.15 41.2,-0.15 41.2,13.25
GND on Mid-Layer 1 "GND-No Net" (solid, remove dead copper, pour order 132): 0.05,13.075 40.975,13.075 41.125,12.925 41.125,-0.15 0.05,-0.15 -0.225,0.125
GND on Top Layer "Top Layer-GND" (solid, remove dead copper, pour order 36): 35.3,6.1 39.1,6.1 39.7,6.7 39.775,6.775 41,6.775 41,4.125 41.025,4.1 37,0.075 30.85,0.075 30.85,2.125 30.875,2.15 32.025,3.3 32.025,6.1
GND on Top Layer "CUAV" (solid, remove dead copper, pour order 26): 0.05,13 19.25,13 19.275,12.975 19.4,12.85 19.4,11.25 17.95,11.25 17.937,11.237 16.525,9.825 0.05,9.825 0,9.875
VCC_OUT2 on Top Layer "CUAV" (solid, remove dead copper, pour order 24): 3.625,3.65 7.1,3.65 7.425,3.975 7.5,4.05 7.5,7.9 7.5,9.675 7.325,9.85 6.993,9.518 3.9,9.518
VCC_OUT2 on Top Layer "CUAV" (solid, remove dead copper, pour order 22): -0.075,10.175 16,10.175 16,8.225 14.084,8.225 13.827,7.968 13.75,7.891 13.75,3.875 11.925,3.875 11.775,3.875 11.65,4 11.65,6.05 11.65,7.35 11.032,7.968 11.014,7.95 0,7.95
VCC_OUT1 on Top Layer "CUAV" (solid, remove dead copper, pour order 20): 16.5,3.8 18.012,3.8 18.231,4.019 18.231,7.006 19.193,7.968 19.2,7.975 21.225,7.975 21.225,10.125 21.275,10.175 21.25,10.2 17.3,10.2 16.9,10.2 16.525,9.825 16.5,9.8 16.5,3.8
VDD_5V_BRICK_IN on Top Layer "Top Layer-No Net 1" (solid, remove dead copper, pour order 8): 35.3,6.1 38.7,6.1 39.1,6.1 39.5,6.5 39.7,6.7 39.7,8.7 35.3,8.7
VDD_5V_BRICK_IN on Top Layer "Top Layer-No Net 1" (solid, remove dead copper, pour order 6): 37.6,0 41,0 41,2.9 40.8,3.1 37.6,3.1 37.6,1.7 37.6,1.1
VBUS on Top Layer "VBUS_L01_P128" (solid, remove dead copper, pour order 128): 22.95,13.05 25.25,13.05 25.325,12.975 25.4,12.9 25.4,10.825 25.4,10.425 25.625,10.2 25.775,10.2 27.95,10.2 27.95,9.75 28.112,9.587 28.625,9.587 30.15,9.588 30.575,10.012 32.163,10.012 32.85,10.7 32.95,10.8 35.025,10.8 35.025,7.4 34.9,7.275 34.775,7.15 22.975,7.15
GND on Bottom Layer "GND-No Net" (solid, remove dead copper, pour order 146): 0.025,13 0.125,13.1 20.575,13 20.575,5.625 18.875,5.625 0.025,5.625
VCC_OUT1 on Bottom Layer "GND-No Net" (solid, remove dead copper, pour order 142): 10.425,9.925 16.175,9.925 16.625,9.475 16.8,9.3 16.8,3.95 16.8,3.85 16.9,3.75 16.95,3.7 18.05,3.7 18.05,10.675 17.45,11.275 17.4,11.325 10.425,11.325
JR_3V3 on Bottom Layer "GND-No Net" (solid, remove dead copper, pour order 140): 8.175,8.475 8.175,7.45 7.975,7.25 7.85,7.125 6.5,7.125 6.275,7.125 5.65,7.75 5.575,7.825 5.575,9.575 5.575,9.825 5.9,10.15 6.05,10.3 6.05,11.075 7.8,11.075 8.05,10.825 8.35,10.525 9.225,10.525 9.225,9.85 9.175,9.8 8.225,9.8 8.075,9.8 7.9,9.625 7.875,9.6 7.225,9.6 7.225,8.675 7.3,8.6 7.4,8.5 8.175,8.5
VDD_5V_BRICK_IN on Bottom Layer "CUAV" (solid, remove dead copper, pour order 32): 37.5,2.9 37.525,2.925 41.025,2.925 41.025,0.025 41,0 40.975,-0.025 37.475,-0.025
VCC_OUT3 on Bottom Layer "CUAV" (solid, remove dead copper, pour order 34): 28.475,8.775 30.193,8.775 30.294,8.876 30.575,9.157 30.575,11.075 30.575,13.025 28.475,13.025
VBUS on Bottom Layer "VBUS_L06_P126" (solid, remove dead copper, pour order 126): 33.85,10.775 36.425,10.775 36.425,9.475 37,8.9 37.225,8.675 37.225,6.525 37.225,6.475 37.8,5.9 37.875,5.825 37.875,3.85 37.875,3.725 37.625,3.475 37.6,3.45 35.75,3.45 35.75,5.3 35.525,5.525 35.475,5.575 34.85,5.575 34.85,6.3 34.6,6.55 34.525,6.625 33.85,6.625
VCC_OUT2 on Mid-Layer 3 "Top Layer-GND" (solid, remove dead copper, pour order 104): -0.275,13.35 14.95,13.35 15.025,13.425 15.625,12.825 15.625,-0.25 -0.2,-0.25 -0.225,-0.225
GND on Mid-Layer 3 "GND-No Net" (solid, remove dead copper, pour order 136): 0.05,13.075 40.975,13.075 41.125,12.925 41.125,-0.15 0.05,-0.15 -0.225,0.125
GND on Mid-Layer 4 "Top Layer-GND" (solid, remove dead copper, pour order 110): -0.475,13.225 -0.4,13.3 41.85,13.3 41.85,-0.525 41.675,-0.7 41.6,-0.625 -0.475,-0.625
VCC_OUT1 on Mid-Layer 2 "VCC_OUT1_L03_P130" (solid, remove dead copper, pour order 130): 16.25,13.025 16.25,0.025 16.225,0 16.25,0.025 34,0.025 34,12.975 33.95,13.025
GND on Mid-Layer 2 "GND-No Net" (solid, remove dead copper, pour order 134): 0.05,13.075 40.975,13.075 41.125,12.925 41.125,-0.15 0.05,-0.15 -0.225,0.125

## Keep-outs
Keep-Out Layer:
  the board outline again, w0.002

## Other copper
Top Layer:
  rectangle net GND: 37.6,4.6 39.925,5.725

## Silkscreen, mask and mechanical layers (free items; w line width, h text height)
Bottom Overlay:
  text "PixHack V3X _ IO" at 14.4,6.475 h1.52